# Altium PCB MB.PcbDoc
Units mil, origin at the board's own origin, x right, y up, seen from the top; angles counter-clockwise.
Board outline 5905.51 x 5945.22 mil, 2 copper layers (Top Layer, Bottom Layer); 33 components, 167 nets, 436 pads, 48 vias.
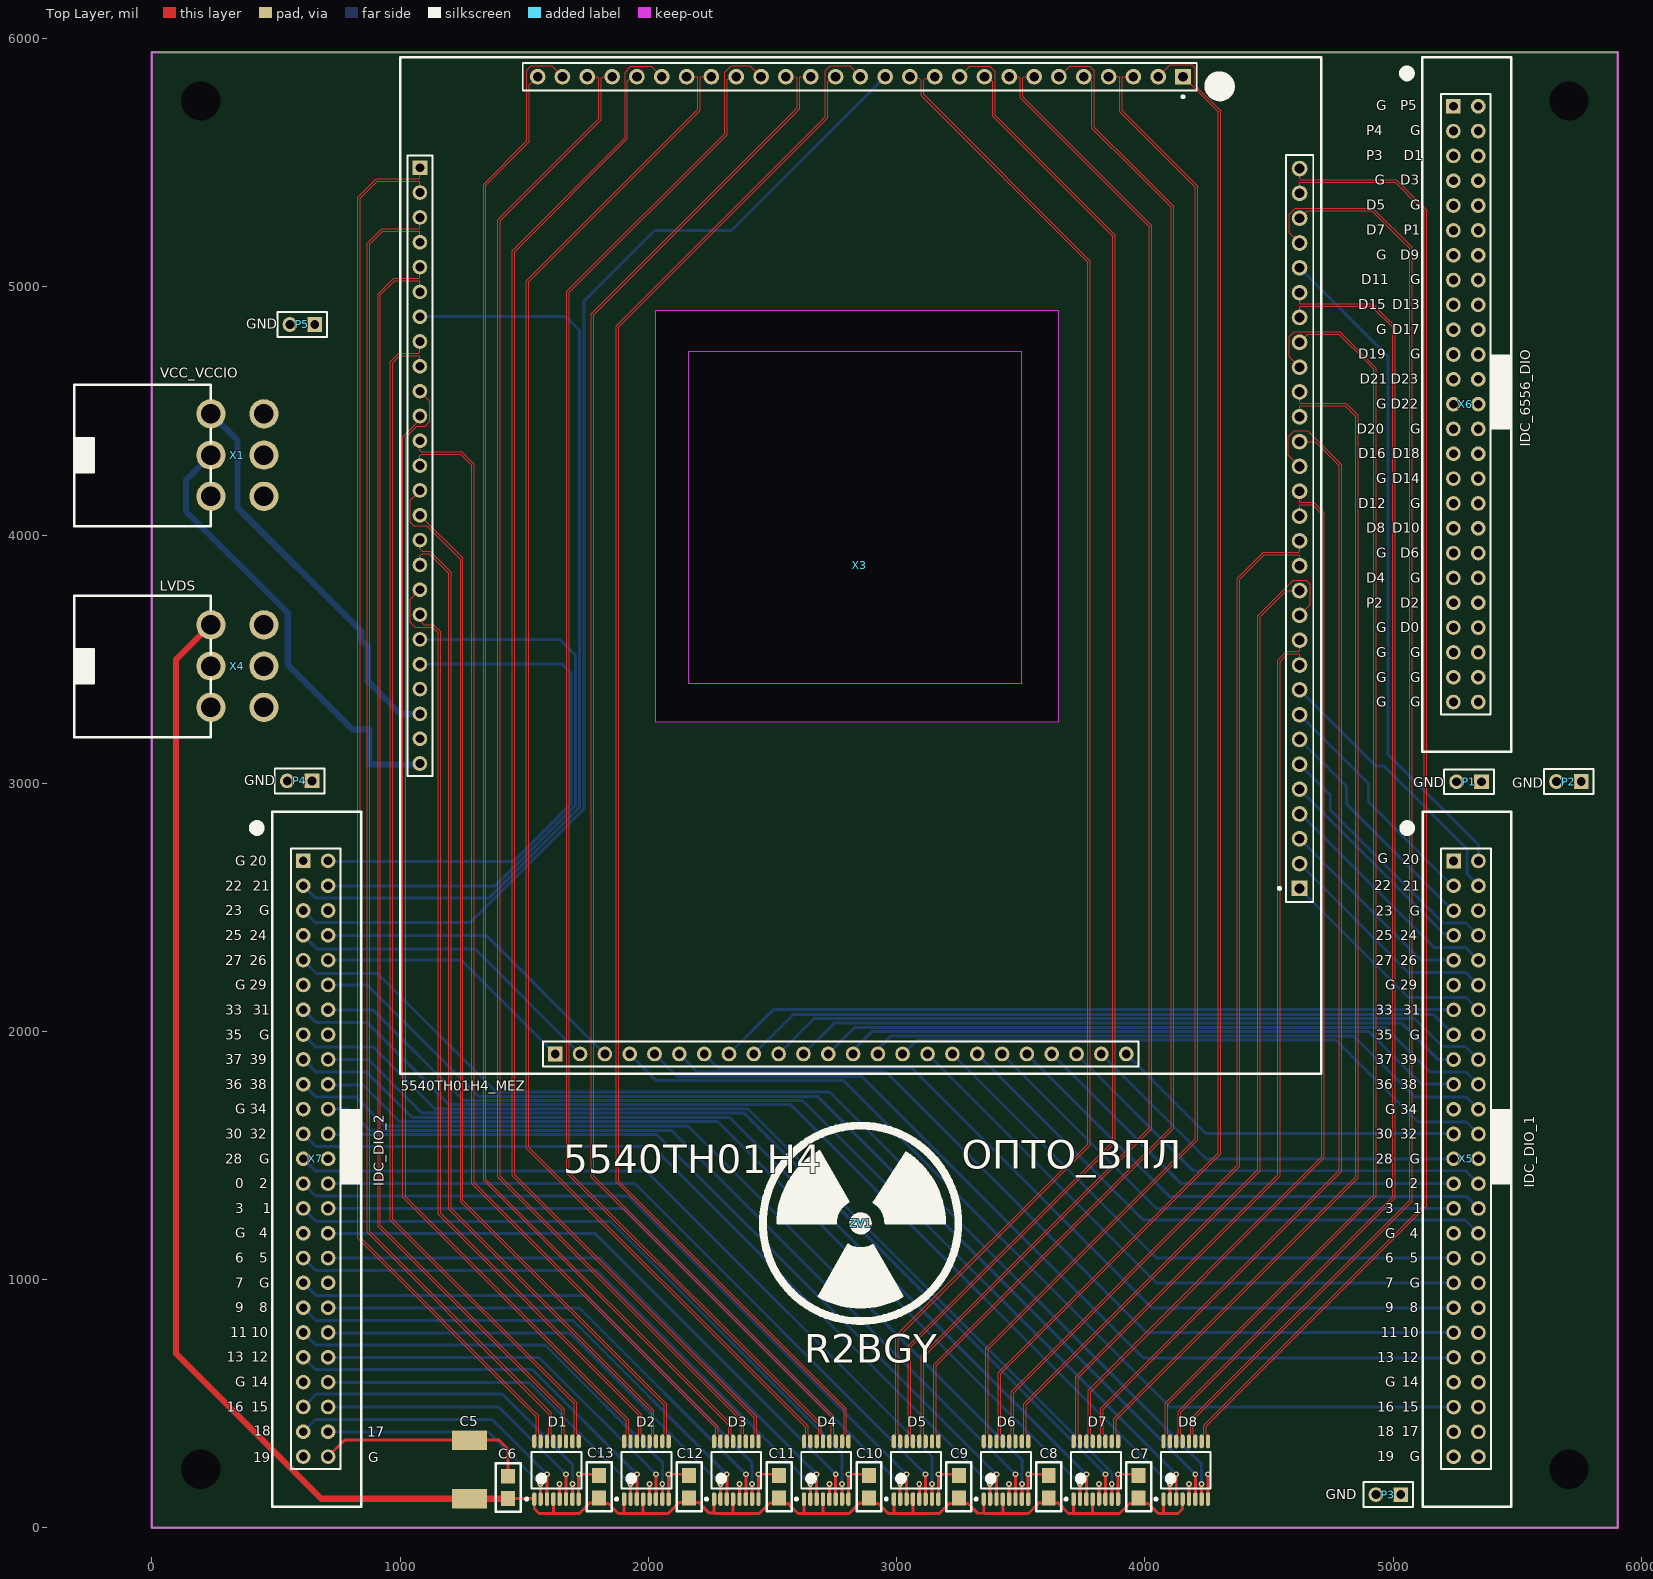
[diagram p0: Top Layer view]
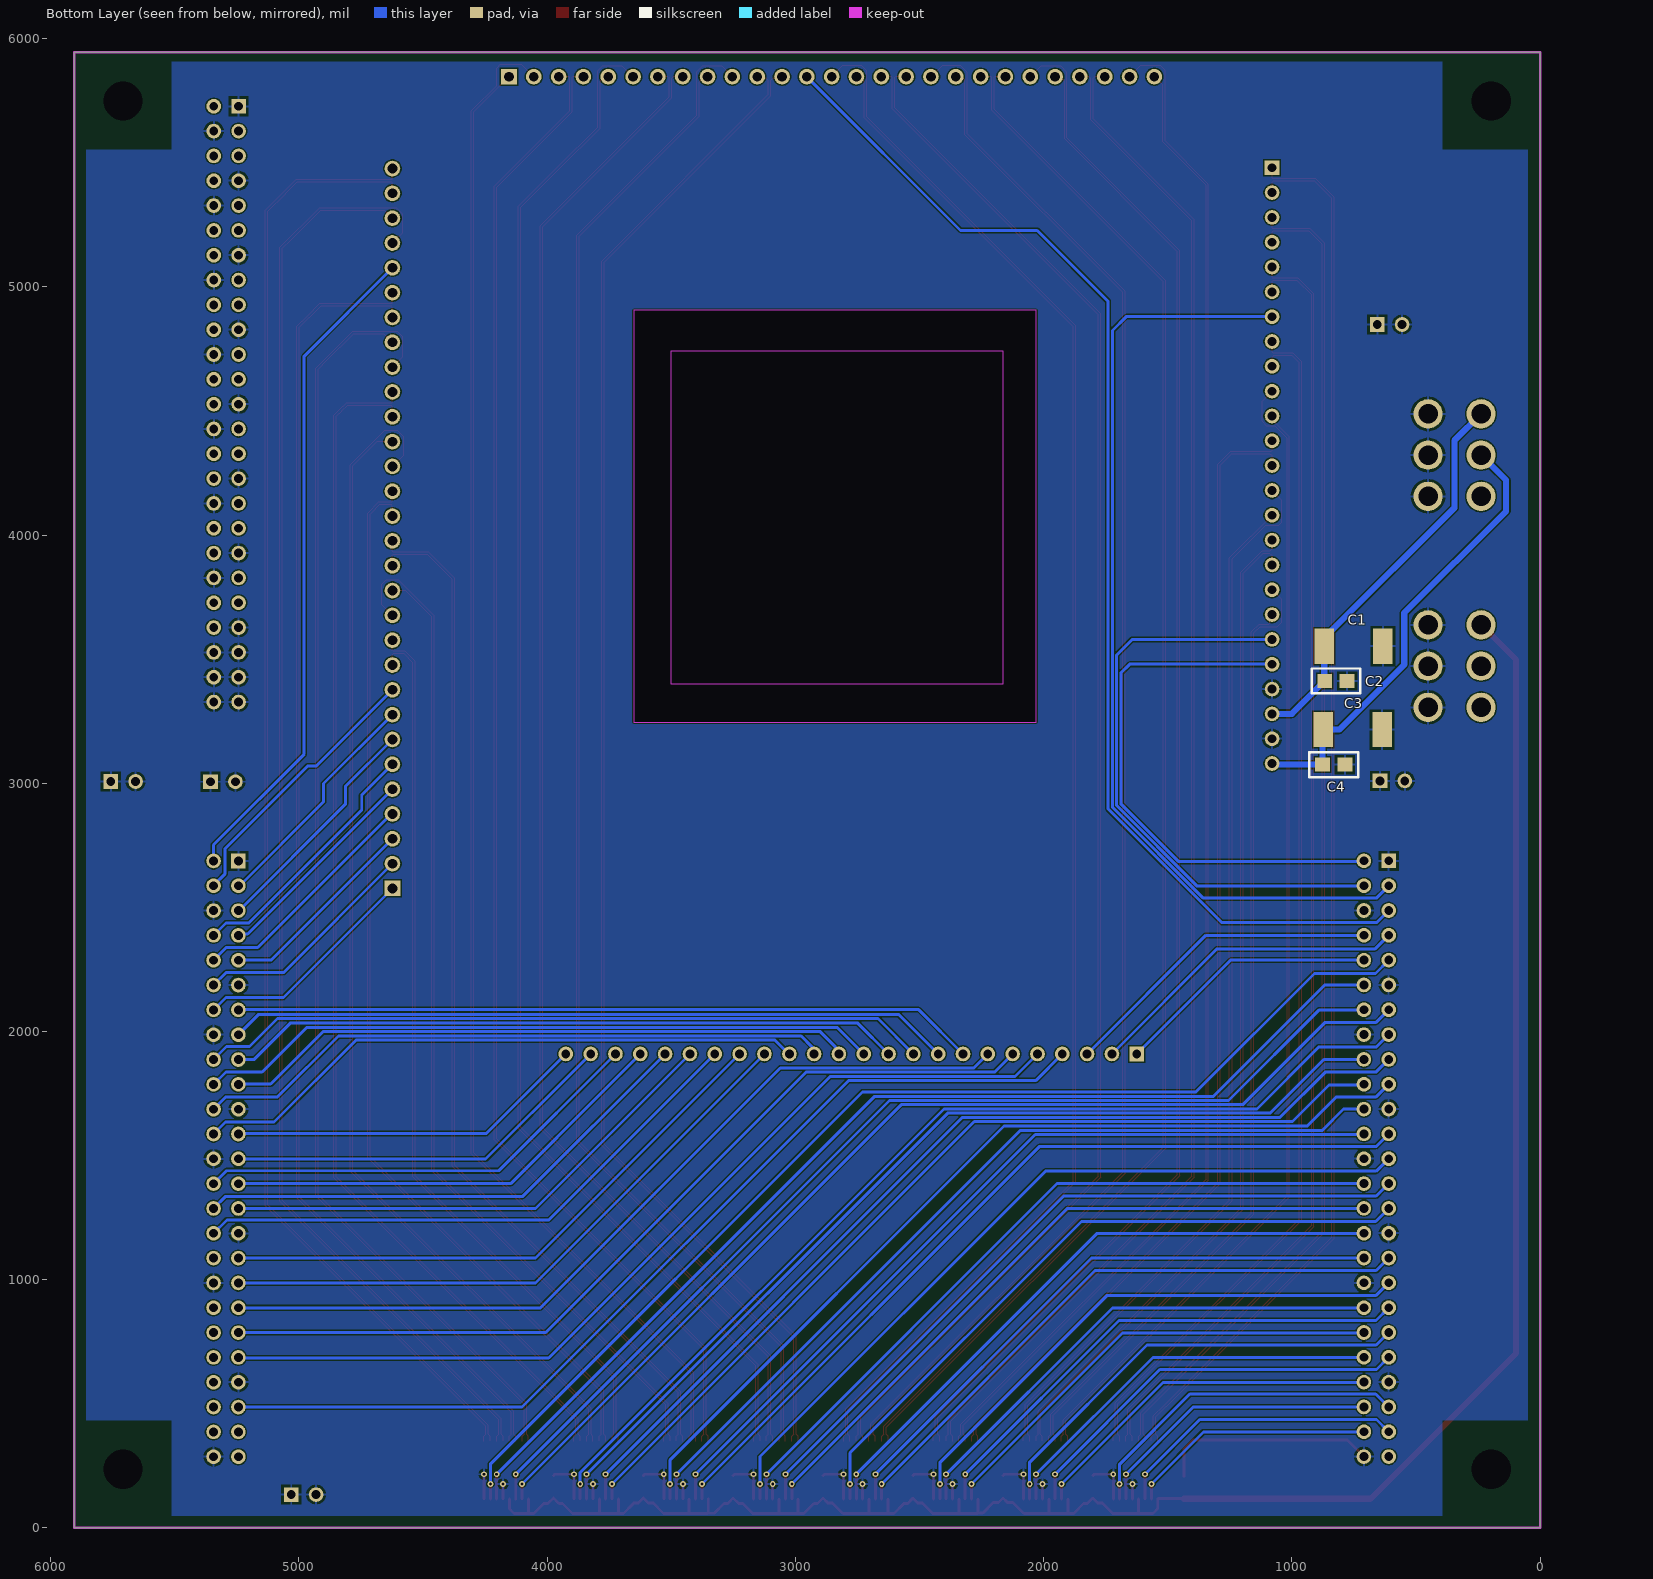
[diagram p1: Bottom Layer view, seen from below]

## Layer stack, top to bottom
Top Solder: solder mask 0.4, Solder Resist, Dk 3.5
Top Layer: signal copper 1.4
Dielectric 1: dielectric 12.6, FR-4, Dk 4.8
Bottom Layer: signal copper 1.4
Bottom Solder: solder mask 0.4, Solder Resist, Dk 3.5

## Board outline
0.15,0 0.15,5945.22 5905.66,5945.22 5905.66,0
cut-out: 3501.87,4740.03 3501.87,3401.45 2163.29,3401.45 2163.29,4740.03
cut-out: 3651,4905.37 3651,3245.37 2030,3245.37 2030,4905.37

## Design rules (kind name [scope] priority, off if disabled: settings)
Clearance [All] p1: gap=5 ignorepadtopadclearanceinfootprint=FALSE
DiffPairsRouting [All] p1: maxlimit=10 minlimit=5 mostfreqgap=5 toplayer_minwidth=5 toplayer_maxwidth=15 toplayer_prefwidth=5 bottomlayer_minwidth=5 bottomlayer_maxwidth=15 bottomlayer_prefwidth=5 maxuncoupledlength=500
PolygonConnect [All] p1: connectstyle=Relief reliefconductorwidth=10 reliefentries=4 polygonreliefangle="90 Angle" airgapwidth=10
RoutingVias [All] p1: holewidth=28 width=50 viastyle="Through Hole" minholewidth=28 minwidth=50 maxholewidth=28 maxwidth=50
SolderMaskExpansion [All] p1: expansion=4 istentingtop=FALSE
Width [All] p1: maxlimit=78.74 minlimit=5 preferedwidth=10
29 further rules are at their usual default settings.

## Classes and differential pairs
differential pair adci3_6: +adci3_6_P -adci3_6_N
differential pair adci3_5: +adci3_5_P -adci3_5_N
differential pair adci3_4: +adci3_4_P -adci3_4_N
differential pair adci3_3: +adci3_3_P -adci3_3_N
differential pair adci3_2: +adci3_2_P -adci3_2_N
differential pair adci3_1: +adci3_1_P -adci3_1_N
differential pair adci3_0: +adci3_0_P -adci3_0_N
differential pair adci2_6: +adci2_6_P -adci2_6_N
differential pair adci2_5: +adci2_5_P -adci2_5_N
differential pair adci2_4: +adci2_4_P -adci2_4_N
differential pair adci2_3: +adci2_3_P -adci2_3_N
differential pair adci2_2: +adci2_2_P -adci2_2_N
differential pair adci2_1: +adci2_1_P -adci2_1_N
differential pair adci2_0: +adci2_0_P -adci2_0_N
differential pair adci1_6: +adci1_6_P -adci1_6_N
differential pair adci1_5: +adci1_5_P -adci1_5_N
differential pair adci1_4: +adci1_4_P -adci1_4_N
differential pair adci1_3: +adci1_3_P -adci1_3_N
differential pair adci1_2: +adci1_2_P -adci1_2_N
differential pair adci1_1: +adci1_1_P -adci1_1_N
differential pair adci1_0: +adci1_0_P -adci1_0_N
differential pair adci0_6: +adci0_6_P -adci0_6_N
differential pair adci0_5: +adci0_5_P -adci0_5_N
differential pair adci0_4: +adci0_4_P -adci0_4_N
differential pair adci0_3: +adci0_3_P -adci0_3_N
differential pair adci0_2: +adci0_2_P -adci0_2_N
differential pair adci0_1: +adci0_1_P -adci0_1_N
differential pair adci0_0: +adci0_0_P -adci0_0_N
differential pair adcc_3: +adcc_3_P -adcc_3_N
differential pair adcc_2: +adcc_2_P -adcc_2_N
differential pair adcc_1: +adcc_1_P -adcc_1_N
differential pair adcc_0: +adcc_0_P -adcc_0_N

## Components (designator, comment, footprint, x,y, rotation, side; value= is the part's Value field where it differs from the comment)
C1 "CAP_BIG" Cap_BIG 913,3627 r270 bottom
C2 "CAP_SMALL" CAP_SMALL 724,3462 r0 bottom
C3 "CAP_BIG" Cap_BIG 916,3291 r270 bottom
C4 "CAP_SMALL" CAP_SMALL 733,3125 r0 bottom
C5 "CAP_BIG" Cap_BIG 1204,75 r0 top
C6 "CAP_SMALL" CAP_SMALL 1385,262 r270 top
C7 "CAP_SMALL" CAP_SMALL 3925,264.37 r270 top
C8 "CAP_SMALL" CAP_SMALL 3563,264.37 r270 top
C9 "CAP_SMALL" CAP_SMALL 3201,264.37 r270 top
C10 "CAP_SMALL" CAP_SMALL 2839,264.37 r270 top
C11 "CAP_SMALL" CAP_SMALL 2477,264.37 r270 top
C12 "CAP_SMALL" CAP_SMALL 2114,264.37 r270 top
C13 "CAP_SMALL" CAP_SMALL 1752,264.37 r270 top
D1 "DS90LV047A" TSOP65P640X120-16N 1630,232.37 r90 top
D2 "DS90LV047A" TSOP65P640X120-16N 1992.14,232.37 r90 top
D3 "DS90LV047A" TSOP65P640X120-16N 2354.29,232.37 r90 top
D4 "DS90LV047A" TSOP65P640X120-16N 2716.43,232.37 r90 top
D5 "DS90LV047A" TSOP65P640X120-16N 3078.57,232.37 r90 top
D6 "DS90LV047A" TSOP65P640X120-16N 3440.71,232.37 r90 top
D7 "DS90LV047A" TSOP65P640X120-16N 3802.86,232.37 r90 top
D8 "DS90LV047A" TSOP65P640X120-16N 4165,232.37 r90 top
P1 "GND" HDR1X2 5356,3006 r180 top
P2 "GND" HDR1X2 5758,3007 r180 top
P3 "GND" HDR1X2 5031,134.37 r180 top
P4 "GND" HDR1X2 645,3009.37 r180 top
P5 "GND" HDR1X2 656,4848 r180 top
X1 "VCC_VCCIO" POWER 238,4488 r90 top
X3 "5540TH01H4_MEZ" 5540TH01H4_MEZ 4154,5846.37 r270 top
X4 "LVDS" POWER 238,3638 r90 top
X5 "IDC_DIO_1" IDC_DIO 5244,2687 r270 top
X6 "IDC_6556_DIO" IDC_6556_DIO 5243,5727.11 r270 top
X7 "IDC_DIO_2" IDC_DIO 610,2687.37 r270 top
ZV1 "RAD" RADIATION 2855,1227 r0 top

## Footprints (in the part's own frame and the unit in brackets; to place one, negate y for a bottom-side part, rotate by r counter-clockwise, add the part's x,y. Pads: shape width x height; smd on the part's side, far side on the other; paste and mask are expansions set on the pad)
5540TH01H4_MEZ [mm]
  rect 1.6x1.6 hole 0.99: 1(0,0) 77(83.06,11.92)
  round 1.6 hole 0.99: 2(0,-2.54) 3(0,-5.08) 4(0,-7.62) 5(0,-10.16) 6(0,-12.7) 7(0,-15.24) 8(0,-17.78) 9(0,-20.32) 10(0,-22.86) 11(0,-25.4) 12(0,-27.94) 13(0,-30.48) 14(0,-33.02) 15(0,-35.56) 16(0,-38.1) 17(0,-40.64) 18(0,-43.18) 19(0,-45.72) 20(0,-48.26) 21(0,-50.8) 22(0,-53.34) 23(0,-55.88) 24(0,-58.42) 25(0,-60.96) 26(0,-63.5) 27(0,-66.04) 78(80.52,11.92) 79(77.98,11.92) 80(75.44,11.92) 81(72.9,11.92) 82(70.36,11.92) 83(67.82,11.92) 84(65.28,11.92) 85(62.74,11.92) 86(60.2,11.92) 87(57.66,11.92) 88(55.12,11.92) 89(52.58,11.92) 90(50.04,11.92) 91(47.5,11.92) 92(44.96,11.92) 93(42.42,11.92) 94(39.88,11.92) 95(37.34,11.92) 96(34.8,11.92) 97(32.26,11.92) 98(29.72,11.92) 99(27.18,11.92) 100(24.64,11.92) 101(22.1,11.92) 102(19.56,11.92) 103(17.02,11.92) 104(14.48,11.92) 105(11.94,11.92) 106(9.4,11.92)
  rect 1.5x1.5 hole 0.9: 28(9.32,-78.08) 53(100,-64.24)
  round 1.5 hole 0.9: 29(11.86,-78.08) 30(14.4,-78.08) 31(16.94,-78.08) 32(19.48,-78.08) 33(22.02,-78.08) 34(24.56,-78.08) 35(27.1,-78.08) 36(29.64,-78.08) 37(32.18,-78.08) 38(34.72,-78.08) 39(37.26,-78.08) 40(39.8,-78.08) 41(42.34,-78.08) 42(44.88,-78.08) 43(47.42,-78.08) 44(49.96,-78.08) 45(52.5,-78.08) 46(55.04,-78.08) 47(57.58,-78.08) 48(60.12,-78.08) 49(62.66,-78.08) 50(65.2,-78.08) 51(67.74,-78.08) 52(70.28,-78.08) 54(100,-61.7) 55(100,-59.16) 56(100,-56.62) 57(100,-54.08) 58(100,-51.54) 59(100,-49) 60(100,-46.46) 61(100,-43.92) 62(100,-41.38) 63(100,-38.84) 64(100,-36.3) 65(100,-33.76) 66(100,-31.22) 67(100,-28.7) 68(100,-26.14) 69(100,-23.6) 70(100,-21.06) 71(100,-18.52) 72(100,-15.98) 73(100,-13.44) 74(100,-10.9) 75(100,-8.36) 76(100,-5.82)
  silkscreen extent -2,-80.08 102,14.13
Cap_BIG [mm] "FROM_MAX"
  rect 3.6x2 smd: 1(1.905,7.092) 2(1.905,1.092)
  body extent 0,-0.01 3.81,8.19, height 2.54
CAP_SMALL [mil] "FROM_MAX"
  rect 60x55.98 smd: 1(53.71,50) 2(143.71,50)
  silkscreen extent 1,0 197,100, body extent 20,18 178,82, height 100
HDR1X2 [mm] "Connector; Header; 2 Position"
  rect 1.5x1.5 hole 0.9: 1(0,0)
  round 1.5 hole 0.9: 2(2.54,0)
  silkscreen extent -1.27,-1.27 3.81,1.27
IDC_6556_DIO [mm]
  rect 1.5x1.5 hole 0.9: 1(0,0)
  round 1.5 hole 0.9: 2(0,2.54) 3(2.54,0) 4(2.54,2.54) 5(5.08,0) 6(5.08,2.54) 7(7.62,0) 8(7.62,2.54) 9(10.16,0) 10(10.16,2.54) 11(12.7,0) 12(12.7,2.54) 13(15.24,0) 14(15.24,2.54) 15(17.78,0) 16(17.78,2.54) 17(20.32,0) 18(20.32,2.54) 19(22.86,0) 20(22.86,2.54) 21(25.4,0) 22(25.4,2.54) 23(27.94,0) 24(27.94,2.54) 25(30.48,0) 26(30.48,2.54) 27(33.02,0) 28(33.02,2.54) 29(35.56,0) 30(35.56,2.54) 31(38.1,0) 32(38.1,2.54) 33(40.64,0) 34(40.64,2.54) 35(43.18,0) 36(43.18,2.54) 37(45.72,0) 38(45.72,2.54) 39(48.26,0) 40(48.26,2.54) 41(50.8,0) 42(50.8,2.54) 43(53.34,0) 44(53.34,2.54) 45(55.88,0) 46(55.88,2.54) 47(58.42,0) 48(58.42,2.54) 49(60.96,0) 50(60.96,2.54)
  silkscreen extent -5.03,-5.14 66.07,5.92
IDC_DIO [mm]
  rect 1.5x1.5 hole 0.9: 1(0,0)
  round 1.5 hole 0.9: 2(0,2.54) 3(2.54,0) 4(2.54,2.54) 5(5.08,0) 6(5.08,2.54) 7(7.62,0) 8(7.62,2.54) 9(10.16,0) 10(10.16,2.54) 11(12.7,0) 12(12.7,2.54) 13(15.24,0) 14(15.24,2.54) 15(17.78,0) 16(17.78,2.54) 17(20.32,0) 18(20.32,2.54) 19(22.86,0) 20(22.86,2.54) 21(25.4,0) 22(25.4,2.54) 23(27.94,0) 24(27.94,2.54) 25(30.48,0) 26(30.48,2.54) 27(33.02,0) 28(33.02,2.54) 29(35.56,0) 30(35.56,2.54) 31(38.1,0) 32(38.1,2.54) 33(40.64,0) 34(40.64,2.54) 35(43.18,0) 36(43.18,2.54) 37(45.72,0) 38(45.72,2.54) 39(48.26,0) 40(48.26,2.54) 41(50.8,0) 42(50.8,2.54) 43(53.34,0) 44(53.34,2.54) 45(55.88,0) 46(55.88,2.54) 47(58.42,0) 48(58.42,2.54) 49(60.96,0) 50(60.96,2.54)
  silkscreen extent -5.03,-5.14 66.07,5.92
POWER [mm] "POWER"
  round 3 hole 2: 1(0,0) 2(-4.217,0) 3(-8.435,0) 4(0,-5.422) 5(-4.217,-5.422) 6(-8.435,-5.422)
  silkscreen extent -11.5,0 3,14
RADIATION [mil]
  silkscreen extent -394,-394 394,394
TSOP65P640X120-16N [mm] "TSOP, 16-Leads, Body 5,00x4,40mm, Pitch 0,65mm, IPC Medium Density"
  oval 1.4x0.45 smd: 1(-2.95,2.275) 2(-2.95,1.625) 3(-2.95,0.975) 4(-2.95,0.325) 5(-2.95,-0.325) 6(-2.95,-0.975) 7(-2.95,-1.625) 8(-2.95,-2.275) 9(2.95,-2.275) 10(2.95,-1.625) 11(2.95,-0.975) 12(2.95,-0.325) 13(2.95,0.325) 14(2.95,0.975) 15(2.95,1.625) 16(2.95,2.275)
  silkscreen extent -3.07,-2.55 1.85,3.17, body extent -2.25,-2.55 2.25,2.55, height 1.2

## Part data
P1 P2 P3 P4 P5: library part "Header 2", "Header, 2-Pin", LatestRevisionDate=17-Jul-2002, LatestRevisionNote="Re-released for DXP Platform.", Publisher="Altium Limited"
X1 X4: library part POWER
X5 X7: library part IDC_DIO
ZV1: library part Radiation

## Free pads (board coordinates)
  round 118.11 hole 157.48 unplated: 0(197,236.56) 0(197,5748.37) 0(5708.81,236.56) 0(5708.81,5748.37)

## Via types
v1: diameter 23.62, hole 11.81, Top Layer to Bottom Layer, 48 vias

## Nets (pads, with @x,y where several pads share a name; then routed paths per layer and width w, separated by ;. In a path a pad name is that pad's centre, name@x,y a point inside that pad or via, vN(x,y) a via of type N, cw(c..) or ccw(c..) an arc to the next point about the centre after c; other vN are vias at no path point)
1_DIN1: D1.2 X7.48 | length 1004
  Top Layer w12: D1.2 v1(1566.02,177.37)
  Bottom Layer w12.01: X7.48@710,387 1356.39,387 v1(1566.02,177.37)
1_DIN2: D1.3 X7.47 | length 1193.7
  Top Layer w12: D1.3 v1(1591.61,216.37)
  Bottom Layer w12.01: X7.47 659.63,437 1370.98,437 v1(1591.61,216.37)
1_DIN3: D1.6 X7.46 | length 1170.8
  Top Layer w12: D1.6 v1(1668.39,216.37)
  Bottom Layer w12: X7.46 1397.39,487.37 v1(1668.39,216.37)
1_DIN4: D1.7 X7.45 | length 1363.8
  Top Layer w12: D1.7 v1(1693.98,177.37)
  Bottom Layer w12: X7.45 662.63,540 1411,540 1693.98,257.02 v1(1693.98,177.37)
2_DIN1: D2.2 X7.44 | length 1448.6
  Top Layer w12: D2.2 v1(1928.17,177.37)
  Bottom Layer w12: X7.44@710,586 1519.54,586 v1(1928.17,177.37)
2_DIN2: D2.3 X7.41 | length 1639
  Top Layer w12: D2.3 v1(1953.76,216.37)
  Bottom Layer w12: X7.41 659.37,638 1532.13,638 v1(1953.76,216.37)
2_DIN3: D2.6 X7.42 | length 1615.6
  Top Layer w12: D2.6 v1(2030.53,216.37)
  Bottom Layer w12: X7.42@710,687 1559.9,687 v1(2030.53,216.37)
2_DIN4: D2.7 X7.39 | length 1811.2
  Top Layer w12: D2.7 v1(2056.12,177.37)
  Bottom Layer w12: X7.39 660.37,737 1584,737 2056.12,264.88 v1(2056.12,177.37)
3_DIN1: D3.2 X7.40 | length 1893.1
  Top Layer w12: D3.2 v1(2290.31,177.37)
  Bottom Layer w12: X7.40@710,785 1682.68,785 v1(2290.31,177.37)
3_DIN2: D3.3 X7.37 | length 2084
  Top Layer w12: D3.3 v1(2315.9,216.37)
  Bottom Layer w12: X7.37 661.37,836 1696.27,836 v1(2315.9,216.37)
3_DIN3: D3.6 X7.38 | length 2060.2
  Top Layer w12: D3.6 v1(2392.67,216.37)
  Bottom Layer w12: X7.38@710,886 1723.04,886 v1(2392.67,216.37)
3_DIN4: D3.7 X7.35 | length 2254.9
  Top Layer w12: D3.7 v1(2418.26,177.37)
  Bottom Layer w12: X7.35 660.37,937 1744,937 2418.26,262.74 v1(2418.26,177.37)
4_DIN1: D4.2 X7.33 | length 2480.5
  Top Layer w12: D4.2 v1(2652.45,177.37)
  Bottom Layer w12: X7.33 660.37,1037 1792.82,1037 v1(2652.45,177.37)
4_DIN2: D4.3 X7.34 | length 2429
  Top Layer w12: D4.3 v1(2678.04,216.37)
  Bottom Layer w12: X7.34 1807.04,1087.37 v1(2678.04,216.37)
4_DIN3: D4.6 X7.32 | length 2547
  Top Layer w12: D4.6 v1(2754.81,216.37)
  Bottom Layer w12: X7.32@710,1187 1784.18,1187 v1(2754.81,216.37)
4_DIN4: D4.7 X7.29 | length 2764.7
  Top Layer w12: D4.7 v1(2780.4,177.37)
  Bottom Layer w12: X7.29 662.37,1235 1848,1235 2780.4,302.6 v1(2780.4,177.37)
5_DIN1: D5.2 X7.30 | length 2824.9
  Top Layer w12: D5.2 v1(3014.59,177.37)
  Bottom Layer w12: X7.30@710,1286 1905.97,1286 v1(3014.59,177.37)
5_DIN2: D5.3 X7.27 | length 3015.4
  Top Layer w12: D5.3 v1(3040.19,216.37)
  Bottom Layer w12: X7.27 660.37,1337 1919.56,1337 v1(3040.19,216.37)
5_DIN3: D5.6 X7.28 | length 2992.1
  Top Layer w12: D5.6 v1(3116.96,216.37)
  Bottom Layer w12: X7.28 1945.96,1387.37 v1(3116.96,216.37)
5_DIN4: D5.7 X7.25 | length 3200.8
  Top Layer w12: D5.7 v1(3142.55,177.37)
  Bottom Layer w12: X7.25 660.37,1437 1993,1437 3142.55,287.45 v1(3142.55,177.37)
6_DIN1: D6.2 X7.23 | length 3411.9
  Top Layer w12: D6.2 v1(3376.74,177.37)
  Bottom Layer w12: X7.23 661.37,1536 2018.11,1536 v1(3376.74,177.37)
6_DIN2: D6.3 X7.24 | length 3359.4
  Top Layer w12: D6.3 v1(3402.33,216.37)
  Bottom Layer w12: X7.24@710,1585 2033.7,1585 v1(3402.33,216.37)
6_DIN3: D6.6 X7.22 | length 3478.5
  Top Layer w12: D6.6 v1(3479.1,216.37)
  Bottom Layer w12: X7.22 791.63,1687.37 877,1602 2093.47,1602 v1(3479.1,216.37)
6_DIN4: D6.7 X7.19 | length 3679.5
  Top Layer w12: D6.7 v1(3504.69,177.37)
  Bottom Layer w12: X7.19 660.37,1737 820,1737 938,1619 2160,1619 3504.69,274.31 v1(3504.69,177.37)
7_DIN1: D7.2 X7.20 | length 3755.5
  Top Layer w12: D7.2 v1(3738.88,177.37)
  Bottom Layer w12: X7.20@710,1784 851,1784 998,1637 2279.25,1637 v1(3738.88,177.37)
7_DIN2: D7.3 X7.17 | length 3946.6
  Top Layer w12: D7.3 v1(3764.47,216.37)
  Bottom Layer w12: X7.17@610.32,1887.68 662,1836 866,1836 1048,1654 2326.84,1654 v1(3764.47,216.37)
7_DIN3: D7.6 X7.18 | length 3923.5
  Top Layer w12: D7.6 v1(3841.24,216.37)
  Bottom Layer w12: X7.18 871.63,1887.37 1088,1671 2386.61,1671 v1(3841.24,216.37)
7_DIN4: D7.7 X7.15 | length 4094.5
  Top Layer w12: D7.7 v1(3866.83,177.37)
  Bottom Layer w12: X7.15 659.37,1938 891,1938 1141,1688 1585.75,1688 2401.87,1688 3866.83,223.04 v1(3866.83,177.37)
8_DIN1: D8.2 X7.13 | length 4343.3
  Top Layer w12: D8.2 v1(4101.02,177.37)
  Bottom Layer w12: X7.13 660.37,2037 866,2037 1198,1705 2573.39,1705 v1(4101.02,177.37)
8_DIN2: D8.3 X7.14 | length 4291.7
  Top Layer w12: D8.3 v1(4126.61,216.37)
  Bottom Layer w12: X7.14 889.63,2087.37 1255,1722 2620.98,1722 v1(4126.61,216.37)
8_DIN3: D8.6 X7.12 | length 4409.9
  Top Layer w12: D8.6 v1(4203.39,216.37)
  Bottom Layer w12: X7.12 867.63,2187.37 1316,1739 2680.76,1739 v1(4203.39,216.37)
8_DIN4: D8.7 X7.9 | length 4600.8
  Top Layer w12: D8.7 v1(4228.98,177.37)
  Bottom Layer w12: X7.9 663.37,2234 909,2234 1387,1756 2730,1756 4228.98,257.02 v1(4228.98,177.37)
adcc_0_N: D8.13 X3.101 | length 5318.5
  Top Layer w5: D8.13 4152.2,368.7 4144.41,376.5 4144.41,465.78 5008,1329.37 5008,4840.51 4969.07,4879.44 4917.22,4931.29 4626.22,4931.29 4623.29,4934.22 X3.101
adcc_0_P: D8.14 X3.100 | length 5302
  Top Layer w5: D8.14 4126.61,368.7 4134.41,376.5 4134.41,469.92 4998,1333.51 4998,4836.37 4962,4872.37 4959.07,4875.3 4913.08,4921.29 4626.22,4921.29 4623.29,4918.36 X3.100
adcc_1_N: D5.16 X3.12 | length 6135.3
  Top Layer w5: D5.16 2989,368.7 2996.8,376.5 2996.8,773.31 3770,1546.51 3770,5099.37 3645,5224.37 3099,5770.37 3099,5831 3090.07,5839.93 3060.44,5839.93 X3.12
adcc_1_P: D5.15 X3.11 | length 6135.3
  Top Layer w5: D5.15 3014.59,368.7 3006.8,376.5 3006.8,769.17 3780,1542.37 3780,5103.51 3109,5774.51 3109,5831 3117.93,5839.93 3147.56,5839.93 X3.11
adcc_2_N: D1.16 X3.28 | length 5638
  Top Layer w5: X3.28 1079.98,5437.37 1077.06,5434.44 902.93,5434.44 829,5360.51 829,1166.37 1507.07,488.3 1510,485.37 1548.23,447.14 1548.23,376.5 1540.43,368.7 D1.16
adcc_2_P: D1.15 X3.29 | length 5621.5
  Top Layer w5: X3.29 1079.98,5421.51 1077.06,5424.44 907.07,5424.44 839,5356.37 839,1170.51 1517.07,492.44 1558.23,451.28 1558.23,376.5 1566.02,368.7 D1.15
adcc_3_N: D2.13 X3.46 | length 3726.1
  Top Layer w5: X3.46 1088.7,3670.72 1088.7,3645.8 1095.4,3639.1 1134.05,3639.1 1163,3610.14 1163,1267.51 1971.55,458.96 1971.55,376.5 1979.35,368.7 D2.13
adcc_3_P: D2.14 X3.45 | length 3872
  Top Layer w5: X3.45 1041,3740.46 1041,3649 1060.9,3629.1 1129.9,3629.1 1153,3606 1153,1263.37 1899,517.37 1961.55,454.82 1961.55,376.5 1953.76,368.7 D2.14
adci0_0_N: D8.16 X3.99 | length 5041.9
  Top Layer w5: D8.16 4075.43,368.7 4083.23,376.5 4083.23,501.74 4923,1341.51 4923,4667.37 4889,4701.37 4781.37,4809 4656,4809 X3.99
adci0_0_P: D8.15 X3.98 | length 5234.3
  Top Layer w5: D8.15 4101.02,368.7 4093.23,376.5 4093.23,497.6 4933,1337.37 4933,4671.51 4785.51,4819 4602,4819 4582,4799 4582,4717.58 X3.98
adci0_1_N: D7.9 X3.97 | length 4840
  Top Layer w5: D7.9 3892.42,368.7 3884.63,376.5 3884.63,436 4859,1410.37 4859,4482.51 4837.07,4504.44 4810.22,4531.29 4626.22,4531.29 4623.29,4534.22 X3.97
adci0_1_P: D7.10 X3.96 | length 4823.5
  Top Layer w5: D7.10 3866.83,368.7 3874.63,376.5 3874.63,440.14 4849,1414.51 4849,4478.37 4830,4497.37 4827.07,4500.3 4806.08,4521.29 4626.22,4521.29 4623.29,4518.36 X3.96
adci0_2_N: D7.12 X3.95 | length 4531.4
  Top Layer w5: D7.12 3815.65,368.7 3823.45,376.5 3823.45,481.96 4783,1441.51 4783,4279.37 4765,4297.37 4686.08,4376.29 X3.95
adci0_2_P: D7.11 X3.94 | length 4755.6
  Top Layer w5: D7.11 3841.24,368.7 3833.45,376.5 3833.45,477.82 4793,1437.37 4793,4283.51 4656.51,4420 4602,4420 4578,4396 4578,4321.58 X3.94
adci0_3_N: D7.13 X3.93 | length 4293.6
  Top Layer w5: D7.13 3790.06,368.7 3782.27,376.5 3782.27,549.64 4723,1490.37 4723,4088.51 4680.22,4131.29 4626.22,4131.29 4623.29,4134.22 X3.93
adci0_3_P: D7.14 X3.92 | length 4277
  Top Layer w5: D7.14 3764.47,368.7 3772.27,376.5 3772.27,553.78 4713,1494.51 4713,4084.37 4676.08,4121.29 4626.22,4121.29 4623.29,4118.36 X3.92
adci0_4_N: D6.12 X3.91 | length 4195.8
  Top Layer w5: D6.12 3453.51,368.7 3461.3,376.5 3461.3,548.82 4373,1460.51 4373,3826.51 4477.78,3931.29 4620.36,3931.29 4623.29,3934.22 X3.91
adci0_4_P: D6.11 X3.90 | length 4179.3
  Top Layer w5: D6.11 3479.1,368.7 3471.3,376.5 3471.3,544.67 4383,1456.37 4383,3822.37 4481.92,3921.29 4620.36,3921.29 4623.29,3918.36 X3.90
adci0_5_N: D6.9 X3.89 | length 3918.2
  Top Layer w5: D6.9 3530.28,368.7 3522.49,376.5 3522.49,496.86 4465,1439.37 4465,3671.37 4569.92,3776.29 X3.89
adci0_5_P: D6.10 X3.88 | length 4140.7
  Top Layer w5: D6.10 3504.69,368.7 3512.49,376.5 3512.49,501 4455,1443.51 4455,3675.51 4597.49,3818 4650,3818 4666,3802 4666,3719 X3.88
adci0_6_N: D7.16 X3.87 | length 3633.2
  Top Layer w5: D7.16 3713.29,368.7 3721.09,376.5 3721.09,608.6 4533,1420.51 4533,3492.51 4571.86,3531.37 4602.54,3531.37 4602.61,3531.29 4620.36,3531.29 4623.29,3534.22 X3.87
adci0_6_P: D7.15 X3.86 | length 3616.7
  Top Layer w5: D7.15 3738.88,368.7 3731.09,376.5 3731.09,604.46 4543,1416.37 4543,3488.37 4576,3521.37 4598.39,3521.37 4598.47,3521.29 4620.36,3521.29 4623.29,3518.36 X3.86
adci1_0_N: D5.13 X3.10 | length 6231.2
  Top Layer w5: D5.13 3065.78,368.7 3057.98,376.5 3057.98,730.21 3880,1552.23 3880,5207.51 3755.07,5332.44 3397,5690.51 3397,5867 3376,5888 3295.63,5888 X3.10
adci1_0_P: D5.14 X3.9 | length 6062.1
  Top Layer w5: D5.14 3040.19,368.7 3047.98,376.5 3047.98,734.35 3870,1556.37 3870,5203.37 3748,5325.37 3745.07,5328.3 3387,5686.37 3387,5825 3365.63,5846.37 X3.9
adci1_1_N: D5.12 X3.8 | length 6137.3
  Top Layer w5: D5.12 3091.37,368.7 3099.16,376.5 3099.16,693.67 4018,1612.51 4018,5241.37 3892,5367.37 3498,5761.37 3498,5840 3491.63,5846.37 X3.8
adci1_1_P: D5.11 X3.7 | length 6139.9
  Top Layer w5: D5.11 3116.96,368.7 3109.16,376.5 3109.16,689.53 4028,1608.37 4028,5245.51 3508,5765.51 3508,5841 3513.37,5846.37 X3.7
adci1_2_N: D5.9 X3.6 | length 6222.1
  Top Layer w5: D5.9 3168.14,368.7 3160.34,376.5 3160.34,652.71 4117,1609.37 4117,5323.51 3963.07,5477.44 3797,5643.51 3797,5870 3778,5889 3696.63,5889 X3.6
adci1_2_P: D5.10 X3.5 | length 6052.3
  Top Layer w5: D5.10 3142.55,368.7 3150.34,376.5 3150.34,656.86 4107,1613.51 4107,5319.37 3956,5470.37 3953.07,5473.3 3787,5639.37 3787,5828.36 3768.99,5846.37 X3.5
adci1_3_N: D6.16 X3.4 | length 6019.9
  Top Layer w5: D6.16 3351.15,368.7 3358.94,376.5 3358.94,724.45 4203,1568.51 4203,5401.37 4056,5548.37 3899,5705.37 3899,5843.44 3896.07,5846.37 X3.4
adci1_3_P: D6.15 X3.3 | length 6019.9
  Top Layer w5: D6.15 3376.74,368.7 3368.94,376.5 3368.94,720.31 4213,1564.37 4213,5405.51 3909,5709.51 3909,5843.44 3911.93,5846.37 X3.3
adci1_4_N: D6.13 X3.2 | length 6120
  Top Layer w5: D6.13 3427.92,368.7 3420.12,376.5 3420.12,621.49 4306,1507.37 4306,5708.51 4204,5810.51 4204,5881 4191,5894 4101.63,5894 X3.2
adci1_4_P: D6.14 X3.1 | length 5926.8
  Top Layer w5: D6.14 3402.33,368.7 3410.12,376.5 3410.12,625.64 4296,1511.51 4296,5704.37 X3.1
adci1_5_N: D8.9 X3.106 | length 5937
  Top Layer w5: D8.9 4254.57,368.7 4246.77,376.5 4246.77,410.14 5135,1298.37 5135,5308.51 5065.07,5378.44 5012.22,5431.29 4626.22,5431.29 4623.29,5434.22 X3.106
adci1_5_P: D8.10 X3.105 | length 5920.4
  Top Layer w5: D8.10 4228.98,368.7 4236.77,376.5 4236.77,414.28 5125,1302.51 5125,5304.37 5058,5371.37 5055.07,5374.3 5008.08,5421.29 4626.22,5421.29 4623.29,5418.36 X3.105
adci1_6_N: D8.12 X3.104 | length 5693.8
  Top Layer w5: D8.12 4177.79,368.7 4185.59,376.5 4185.59,439.1 5067,1320.51 5067,5154.37 5034,5187.37 4914.37,5307 4654,5307 X3.104
adci1_6_P: D8.11 X3.103 | length 5884.1
  Top Layer w5: D8.11 4203.39,368.7 4195.59,376.5 4195.59,434.96 5077,1316.37 5077,5158.51 4918.51,5317 4605,5317 4581,5293 4581,5218.58 X3.103
adci2_0_N: D3.13 X3.27 | length 5996.4
  Top Layer w5: X3.27 1521,5813.37 1521,5583.23 1346,5408.23 1346,1405.51 2333.7,417.82 2333.7,376.5 2341.49,368.7 D3.13
adci2_0_P: D3.14 X3.26 | length 6177.4
  Top Layer w5: X3.26 1610.37,5890 1528,5890 1511,5873 1511,5587.37 1336,5412.37 1336,1401.37 2290,447.37 2323.7,413.68 2323.7,376.5 2315.9,368.7 D3.14
adci2_1_N: D3.12 X3.25 | length 6119.5
  Top Layer w5: X3.25 1793.63,5846.37 1801,5839 1801,5677.37 1393,5269.37 1393,1412.37 2315.07,490.3 2318,487.37 2374.88,430.49 2374.88,376.5 2367.08,368.7 D3.12
adci2_1_P: D3.11 X3.24 | length 6115.5
  Top Layer w5: X3.24 1853.56,5845.93 1817.93,5845.93 1811,5839 1811,5673.23 1403,5265.23 1403,1416.51 2325.07,494.44 2384.88,434.64 2384.88,376.5 2392.67,368.7 D3.11
adci2_2_N: D3.9 X3.23 | length 6120.7
  Top Layer w5: X3.23 1942.9,5835.27 1923.27,5835.27 1916,5828 1916,5595.37 1461,5140.37 1461,1423.51 2436.06,448.45 2436.06,376.5 2443.85,368.7 D3.9
adci2_2_P: D3.10 X3.22 | length 6287.7
  Top Layer w5: X3.22 2011.37,5889 1930,5889 1906,5865 1906,5599.51 1451,5144.51 1451,1419.37 2254,616.37 2426.06,444.31 2426.06,376.5 2418.26,368.7 D3.10
adci2_3_N: D4.16 X3.21 | length 6296.4
  Top Layer w5: X3.21 2196.07,5846.37 2199,5843.44 2199,5714.51 1509,5024.51 1509,1530.37 2588.07,451.3 2591,448.37 2634.66,404.71 2634.66,376.5 2626.86,368.7 D4.16
adci2_3_P: D4.15 X3.20 | length 6296.4
  Top Layer w5: X3.20 2211.93,5846.37 2209,5843.44 2209,5710.37 1519,5020.37 1519,1534.51 2598.07,455.44 2644.66,408.86 2644.66,376.5 2652.45,368.7 D4.15
adci2_4_N: D4.13 X3.19 | length 6213.8
  Top Layer w5: X3.19 2345.63,5838 2321,5838 2317,5834 2317,5612.37 1682,4977.37 1682,1433.51 2695.84,419.67 2695.84,376.5 2703.63,368.7 D4.13
adci2_4_P: D4.14 X3.18 | length 6378.9
  Top Layer w5: X3.18 2409.37,5891 2333,5891 2307,5865 2307,5616.51 1672,4981.51 1672,1429.37 2392,709.37 2685.84,415.53 2685.84,376.5 2678.04,368.7 D4.14
adci2_5_N: D4.12 X3.17 | length 6288.3
  Top Layer w5: X3.17 2596.07,5846.37 2599,5843.44 2599,5720.51 1770,4891.51 1770,1413.37 2673.07,510.3 2676,507.37 2737.02,446.35 2737.02,376.5 2729.22,368.7 D4.12
adci2_5_P: D4.11 X3.16 | length 6288.3
  Top Layer w5: X3.16 2611.93,5846.37 2609,5843.44 2609,5716.37 1780,4887.37 1780,1417.51 2683.07,514.44 2747.02,450.49 2747.02,376.5 2754.81,368.7 D4.11
adci2_6_N: D4.9 X3.15 | length 6249.1
  Top Layer w5: X3.15 2743.01,5846.37 2723,5826.36 2723,5681.23 1881,4839.23 1881,1397.51 2798.2,480.31 2798.2,376.5 2806,368.7 D4.9
adci2_6_P: D4.10 X3.14 | length 6420.8
  Top Layer w5: D4.10 2780.4,368.7 2788.2,376.5 2788.2,476.17 1873.93,1390.44 1871,1393.37 1871,4843.37 2713,5685.37 2713,5870 2733,5890 2810.37,5890 X3.14
adci3_0_N: D2.12 X3.44 | length 4028
  Top Layer w5: X3.44 1079.98,3915.98 1089,3925 1117,3925 1196,3846 1196,1284.37 1972.07,508.3 1975,505.37 2012.73,467.64 2012.73,376.5 2004.94,368.7 D2.12
adci3_0_P: D2.11 X3.43 | length 4043.5
  Top Layer w5: X3.43 1079.98,3944.02 1089,3935 1121.14,3935 1206,3850.14 1206,1288.51 1982.07,512.44 2022.73,471.78 2022.73,376.5 2030.53,368.7 D2.11
adci3_1_N: D2.9 X3.42 | length 4145.9
  Top Layer w5: X3.42 1252,3907.43 1252,1320.51 2073.91,498.6 2073.91,376.5 2081.71,368.7 D2.9
adci3_1_P: D2.10 X3.41 | length 4305.2
  Top Layer w5: X3.41 1041,4140.46 1041,4051 1054,4038 1107.28,4038 1242,3903.28 1242,1316.37 1980,578.37 2063.91,494.46 2063.91,376.5 2056.12,368.7 D2.10
adci3_2_N: D3.16 X3.40 | length 4613.2
  Top Layer w5: X3.40 1079.98,4318.98 1087,4326 1244,4326 1289,4281 1289,1386.37 2249.07,426.3 2252,423.37 2272.51,402.86 2272.51,376.5 2264.72,368.7 D3.16
adci3_2_P: D3.15 X3.39 | length 4627.8
  Top Layer w5: X3.39 1079.98,4341.02 1085,4336 1248.14,4336 1299,4285.14 1299,1390.51 2259.07,430.44 2282.51,407 2282.51,376.5 2290.31,368.7 D3.15
adci3_3_N: D2.16 X3.38 | length 4536.1
  Top Layer w5: X3.38 1079.98,4465.13 1010,4395.14 1010,1332.37 1877.07,465.3 1880,462.37 1910.37,432 1910.37,376.5 1902.58,368.7 D2.16
adci3_3_P: D2.15 X3.37 | length 4684.4
  Top Layer w5: X3.37 1120,4539.43 1120,4458 1101,4439 1068,4439 1020,4391 1020,1336.51 1887.07,469.44 1920.37,436.14 1920.37,376.5 1928.17,368.7 D2.15
adci3_4_N: D1.9 X3.36 | length 4816.3
  Top Layer w5: X3.36 1079.98,4717.02 1074.57,4722.43 999.06,4722.43 971,4694.37 971,1244.51 1711.77,503.74 1711.77,376.5 1719.57,368.7 D1.9
adci3_4_P: D1.10 X3.35 | length 4836.9
  Top Layer w5: X3.35 1079.98,4737.98 1074.43,4732.43 994.91,4732.43 961,4698.51 961,1240.37 1633,568.37 1701.77,499.6 1701.77,376.5 1693.98,368.7 D1.10
adci3_5_N: D1.12 X3.32 | length 5170.9
  Top Layer w5: X3.32 1079.98,5037.37 1077.06,5034.44 1027.14,5034.44 1027.07,5034.37 973.86,5034.37 911,4971.51 911,1214.37 1584.07,541.3 1587,538.37 1650.59,474.78 1650.59,376.5 1642.8,368.7 D1.12
adci3_5_P: D1.11 X3.33 | length 5154.3
  Top Layer w5: X3.33 1079.98,5021.51 1077.06,5024.44 1031.28,5024.44 1031.21,5024.37 978,5024.37 921,4967.37 921,1218.51 1594.07,545.44 1660.59,478.92 1660.59,376.5 1668.39,368.7 D1.11
adci3_6_N: D1.13 X3.31 | length 5397.7
  Top Layer w5: X3.31 1079.98,5221.51 1077.06,5224.44 930.07,5224.44 877,5171.37 877,1195.51 1609.41,463.1 1609.41,376.5 1617.2,368.7 D1.13
adci3_6_P: D1.14 X3.30 | length 5414.3
  Top Layer w5: X3.30 1079.98,5237.37 1077.06,5234.44 925.93,5234.44 867,5175.51 867,1191.37 1511,547.37 1599.41,458.96 1599.41,376.5 1591.61,368.7 D1.14
clk_60: X3.77 X5.14 | length 923.4
  Bottom Layer w12: X3.77 5062.58,2137 5294,2137 X5.14
DIO0: X6.44
DIO1: X6.6
DIO2: X6.42
DIO3: X6.8
DIO4: X6.39
DIO5: X6.9
DIO6: X6.38
DIO7: X6.11
DIO8: X6.35
DIO9: X6.14
DIO10: X6.36
DIO11: X6.15
DIO12: X6.33
DIO13: X6.18
DIO14: X6.32
DIO15: X6.17
DIO16: X6.29
DIO17: X6.20
DIO18: X6.30
DIO19: X6.21
DIO20: X6.27
DIO21: X6.23
DIO22: X6.26
DIO23: X6.24
eno: X3.47 X7.4 | length 2389.3
  Bottom Layer w12: X7.4@710,2585.45 1381.37,2585.45 1706,2910.08 1706,3517 1643.56,3579.44 X3.47
GND: C1.1 C2.1 C3.1 C4.1 C5.1 C6.1 C7.1 C8.1 C9.1 C10.1 C11.1 C12.1 C13.1 D1.5 D1.8 D2.5 D2.8 D3.5 D3.8 D4.5 D4.8 D5.5 D5.8 D6.5 D6.8 D7.5 D7.8 D8.5 D8.8 P1.1 P1.2 P2.1 P2.2 P3.1 P3.2 P4.1 P4.2 P5.1 P5.2 X1.4 X1.5 X1.6 X3.49 X3.51 X4.4 X4.5 X4.6 X5.1 X5.6 X5.11 X5.16 X5.21 X5.26 X5.31 X5.36 X5.43 X5.50 X6.1 X6.4 X6.7 X6.10 X6.13 X6.16 X6.19 X6.22 X6.25 X6.28 X6.31 X6.34 X6.37 X6.40 X6.43 X6.45 X6.46 X6.47 X6.48 X6.49 X6.50 X7.1 X7.6 X7.11 X7.16 X7.21 X7.26 X7.31 X7.36 X7.43 X7.50 | length 2763.3
  Top Layer w12: X7.50 776.85,354.22 C5.1 1398.78,354.22 1435,318 C6.1 ; D1.5 v1(1642.8,177.37) ; D1.8 v1(1719.57,216.37) 1796.29,216.37 C13.1 ; D2.5 v1(2004.94,177.37) ; D2.8 v1(2081.71,216.37) 2158.29,216.37 C12.1 ; D3.5 v1(2367.08,177.37) ; D3.8 v1(2443.85,216.37) 2521.29,216.37 C11.1 ; D4.5 v1(2729.22,177.37) ; D4.8 v1(2806,216.37) 2883.29,216.37 C10.1 ; D5.5 v1(3091.37,177.37) ; D5.8 v1(3168.14,216.37) 3245.29,216.37 C9.1 ; D6.5 v1(3453.51,177.37) ; D6.8 v1(3530.28,216.37) 3607.29,216.37 C8.1 ; D7.5 v1(3815.65,177.37) ; D7.8 v1(3892.42,216.37) 3969.29,216.37 C7.1 ; D8.5 v1(4177.79,177.37) ; D8.8 v1(4254.57,216.37)
lack0: X3.58 X5.39 | length 3584
  Bottom Layer w12: X3.58 2198.23,1836 2957,1836 4006,787 X5.39
lack1: X3.68 X5.35 | length 2501.2
  Bottom Layer w12: X3.68 4047.23,987 X5.35
lclk0: X3.57 X5.41 | length 3726.3
  Bottom Layer w12: X3.57 2115.23,1819 2860,1819 3994,685 X5.41@5244,685
lclk1: X3.67 X5.24 | length 2499.5
  Bottom Layer w12: X3.67 3026.36,1909.36 3082,1965 4770,1965 5100,1635 5296,1635 X5.24
lnk0_0: X3.59 X5.37 | length 3442.6
  Bottom Layer w12: X3.59 2281.23,1853 3061,1853 4027,887 X5.37
lnk0_1: X3.60 X5.13 | length 2993.1
  Bottom Layer w12: X3.60 2503.5,2088 X5.13@5244,2088
lnk0_2: X3.61 X5.15 | length 2919.2
  Bottom Layer w12: X3.61 2584.5,2069 5162,2069 X5.15
lnk0_3: X3.62 X5.18 | length 2954.7
  Bottom Layer w12: X3.62 2667.5,2052 5086,2052 5199,1939 5292,1939 X5.18@5349.78,1881.22
lnk0_4: X3.63 X5.17 | length 2732.1
  Bottom Layer w12: X3.63 2750.5,2035 5033,2035 5180,1888 X5.17@5244,1888
lnk0_5: X3.64 X5.20 | length 2758.2
  Bottom Layer w12: X3.64 2831.5,2016 4969,2016 5148,1837 5294,1837 X5.20
lnk0_6: X3.65 X5.19 | length 2552.2
  Bottom Layer w12: X3.65 2824.87,1922.1 2839.22,1936.45 2839.22,1938.22 2900,1999 4903,1999 5114,1788 X5.19@5244,1788
lnk0_7: X3.66 X5.22 | length 2583.4
  Bottom Layer w12: X3.66 2933.87,1918.37 2933.87,1938.87 2977,1982 4841,1982 5087,1736 5295,1736 X5.22
lnk1_0: X3.69 X5.33 | length 2359.8
  Bottom Layer w12: X3.69 4047.23,1087 X5.33
lnk1_1: X3.70 X5.32 | length 2318.3
  Bottom Layer w12: X3.70 3993.23,1241 5290,1241 X5.32
lnk1_2: X3.71 X5.29 | length 2076.9
  Bottom Layer w12: X3.71 4047.23,1287 X5.29
lnk1_3: X3.72 X5.30 | length 2076.9
  Bottom Layer w12: X3.72 4098.23,1336 5295,1336 X5.30
lnk1_4: X3.73 X5.27 | length 1835.5
  Bottom Layer w12: X3.73 3771.23,1763 4147.23,1387 X5.27
lnk1_5: X3.74 X5.28 | length 1847.4
  Bottom Layer w12: X3.74 4195.23,1439 5292,1439 X5.28@5352.44,1378.56
lnk1_6: X3.75 X5.25 | length 1594.5
  Bottom Layer w12: X3.75 3880.23,1854 4248.23,1486 X5.25@5244,1486
lnk1_7: X3.76 X5.23 | length 1451.8
  Bottom Layer w12: X3.76 4245.23,1589 X5.23@5244,1589
LVDS: C5.2 C6.2 C7.2 C8.2 C9.2 C10.2 C11.2 C12.2 C13.2 D1.1 D1.4 D2.1 D2.4 D3.1 D3.4 D4.1 D4.4 D5.1 D5.4 D6.1 D6.4 D7.1 D7.4 D8.1 D8.4 X4.1 | length 8563.7
  Top Layer w12: C6.2 1538.37,118.29 D1.1 1540.43,77.94 1560,58.37 1617,58.37 ; D1.4 1617.2,59.57 1617,59.37 1617,58.37 ; D2.1 1902.58,58.79 1903,58.37 ; D2.4 1979.35,59.02 1980,58.37 ; D3.1 2264.72,59.65 ; D3.4 2341.49,61.86 2338,58.37 ; D4.1 2626.86,59.23 2626,58.37 ; D4.4 2703.63,59 2703,58.37 ; D5.1 2989,61.37 2986,58.37 ; D5.4 3065.78,61.15 3063,58.37 ; D6.1 3351.15,59.22 ; D6.4 3427.92,61.45 3431,58.37 ; D7.1 3713.29,61.08 3716,58.37 ; D7.4 3790.06,59.31 3791,58.37 ; D8.1 4075.43,60.8 4073,58.37 ; D8.4 4152.2,77.41 4133.17,58.37 4073,58.37 ; 1617,58.37 1722,58.37 1763.42,99.79 1781.13,99.79 C13.2 1802,120.28 1823.99,98.29 1839.08,98.29 1879,58.37 1903,58.37 ; 1903,58.37 1980,58.37 ; 1980,58.37 2080,58.37 2125.04,103.41 2146.75,103.41 C12.2 2182.25,102.41 2202.96,102.41 2245.72,59.65 2264.72,59.65 ; 2264.72,59.65 2266,58.37 2338,58.37 ; 2338,58.37 2447,58.37 2488.42,99.79 2506.13,99.79 C11.2 2527,119.78 2548.99,97.79 2563.58,97.79 2603,58.37 2626,58.37 ; 2626,58.37 2703,58.37 ; 2703,58.37 2809,58.37 2850.42,99.79 2868.13,99.79 C10.2 2889,120.36 2910.99,98.37 2926,98.37 2966,58.37 2986,58.37 ; 2986,58.37 3063,58.37 ; 3063,58.37 3172,58.37 3212.92,99.29 3229.63,99.29 C9.2 3251,120.28 3272.99,98.29 3288.08,98.29 3327.15,59.22 3351.15,59.22 ; 3351.15,59.22 3352,58.37 3431,58.37 ; 3431,58.37 3531,58.37 3574.04,101.41 3593.75,101.41 C8.2 3633.87,99.79 3651.58,99.79 3693,58.37 3716,58.37 ; 3716,58.37 3791,58.37 ; 3791,58.37 3898,58.37 3937.92,98.29 3953.01,98.29 3975,120.28 C7.2 3996.24,99.42 4013.21,99.42 4054.26,58.37 4073,58.37
  Top Layer w25: X4.1 97,3497 97,704 683,118 C5.2 1434.71,118 C6.2
nrst: X3.56 X5.45 | length 3908.3
  Bottom Layer w12: X3.56 2032.23,1802 2786,1802 4101,487 X5.45
nstc: X3.78 X5.12 | length 923.4
  Bottom Layer w12: X3.78 5062.58,2237 5294,2237 X5.12
ovr_0: X3.85 X5.4 | length 1107.4
  Bottom Layer w12: X3.85 4929.58,3070 4964,3070 5297.17,2736.83 5297.17,2635.83 X5.4@5345,2588
ovr_1: X3.102 X5.2 | length 2687.8
  Bottom Layer w12: X3.102 4979,4720.58 4979,3117 5344,2752 X5.2
ovr_2: X3.13 X7.5 | length 4973.5
  Bottom Layer w12: X7.5@609.81,2487.19 658,2439 1283,2439 1740,2896 1740,4941 2026,5227 2334.63,5227 X3.13
ovr_3: X3.34 X7.3 | length 3872.6
  Bottom Layer w12: X7.3@609.71,2587.08 659.78,2537 1356.96,2537 1723,2903.04 1723,4824 1667.56,4879.44 X3.34
PFI1: X6.12
PFI2: X6.41
PFI3: X6.5
PFI4: X6.3
PFI5: X6.2
sck: X3.54 X7.7 | length 1312.9
  Bottom Layer w12: X7.7 664.37,2333 1301.23,2333 X3.54
sdi: X3.55 X7.8 | length 1312.9
  Bottom Layer w12: X7.8 1346.86,2387.37 X3.55
sdo: X3.48 X7.2 | length 2225.5
  Bottom Layer w12: X7.2@710,2685.45 1457.32,2685.45 1689,2917.12 1689,3444 1653.56,3479.44 X3.48
ss: X3.53 X7.10 | length 1071.4
  Bottom Layer w12: X7.10 1246.86,2287.37 X3.53
strob_0: X3.84 X5.3 | length 947.9
  Bottom Layer w12: X3.84 4901,2998.58 4901,2925 X5.3@5241.5,2584.5
strob_1: X3.83 X5.5 | length 947.3
  Bottom Layer w12: X3.83 4813,2986.58 4813,2915 X5.5@5242.5,2485.5
strob_2: X3.82 X5.8 | length 1041.7
  Bottom Layer w12: X3.82 4747,2952.58 4747,2892 5202,2437 5294,2437 X5.8
strob_3: X3.81 X5.7 | length 864.8
  Bottom Layer w12: X3.81 5206.68,2392.9 5238.1,2392.9 X5.7
strob_4: X3.80 X5.10 | length 964.8
  Bottom Layer w12: X3.80 4627.71,2876.29 5029,2475 5166,2338 5293,2338 X5.10
strob_5: X3.79 X5.9 | length 823.4
  Bottom Layer w12: X3.79 5112.58,2287 X5.9
VCC: C1.2 C2.2 X1.1 X3.50 | length 1607.1
  Bottom Layer w25: X1.1 345,4381 345,4110 843.13,3611.87 843.13,3578.87 C1.2 870,3414.29 C2.2 869.72,3412 885.21,3396.51 885.21,3394.5 1000.27,3279.44 X3.50
VCCIO: C3.2 C4.2 X1.2 X3.52 | length 1837.8
  Bottom Layer w25: X1.2 137,4220.96 137,4096 547,3686 547,3478 809,3216 C3.2 876.71,3212.29 C4.2 1075.54,3075 X3.52
pads on no net: X1.3 X4.2 X4.3 X5.34 X5.38 X5.40 X5.42 X5.44 X5.46 X5.47 X5.48 X5.49 X7.49

## Polygon pours and split planes (outlines as drawn)
GND on Bottom Layer "Top Overlay-No Net" (solid, remove dead copper, pour order 0): 49.21,49.21 49.21,5905.51 5856.3,5905.51 5856.3,49.21

## Keep-outs
Keep-Out Layer:
  the board outline again, w10

## Other copper
Bottom Layer:
  pour cut-out: 393.7,5551.18 0,5551.18 0,5944.88 393.7,5944.88
  pour cut-out: 5905.51,5551.18 5511.81,5551.18 5511.81,5944.88 5905.51,5944.88
  pour cut-out: 5905.51,0 5511.81,0 5511.81,433.07 5905.51,433.07
  pour cut-out: 393.7,0 0,0 0,433.07 393.7,433.07

## Silkscreen, mask and mechanical layers (free items; w line width, h text height)
Top Overlay:
  circle w59.06: c4300,5808.37 r30.19
  text "ОПТО_ВПЛ" at 3262.63,1408.22 h196.85
  text "5540TH01H4" at 1657.64,1390 h196.85
  text "R2BGY" at 2627.82,628 h196.85

## Text inside footprints (layer, text, board x,y; h text height)
X5: Top Overlay "19" at 4936.54,268.68 h39.37; Top Overlay "G" at 5067.34,268.68 h39.37; Top Overlay "18" at 4936.54,368.6 h39.37; Top Overlay "17" at 5034.54,368.59 h39.37; Top Overlay "16" at 4936.54,468.51 h39.37; Top Overlay "15" at 5034.54,468.51 h39.37; Top Overlay "G" at 4969.34,568.43 h39.37; Top Overlay "14" at 5034.54,568.43 h39.37; Top Overlay "13" at 4936.54,668.35 h39.37; Top Overlay "12" at 5034.54,668.34 h39.37; Top Overlay "11" at 4949.66,768.26 h39.37; Top Overlay "10" at 5034.54,768.26 h39.37; Top Overlay "9" at 4969.34,868.18 h39.37; Top Overlay "8" at 5067.34,868.18 h39.37; Top Overlay "7" at 4969.34,968.1 h39.37; Top Overlay "G" at 5067.34,968.09 h39.37; Top Overlay "6" at 4969.34,1068.01 h39.37; Top Overlay "5" at 5067.34,1068.01 h39.37; Top Overlay "G" at 4969.34,1167.93 h39.37; Top Overlay "4" at 5067.34,1167.93 h39.37; Top Overlay "3" at 4969.34,1267.84 h39.37; Top Overlay "1" at 5080.46,1267.84 h39.37; Top Overlay "0" at 4969.34,1367.76 h39.37; Top Overlay "2" at 5067.34,1367.76 h39.37; Top Overlay "28" at 4929.98,1467.68 h39.37; Top Overlay "G" at 5067.34,1467.68 h39.37; Top Overlay "30" at 4929.98,1567.59 h39.37; Top Overlay "32" at 5027.98,1567.59 h39.37; Top Overlay "G" at 4969.34,1667.51 h39.37; Top Overlay "34" at 5027.98,1667.51 h39.37; Top Overlay "36" at 4929.98,1767.43 h39.37; Top Overlay "38" at 5027.98,1767.43 h39.37; Top Overlay "37" at 4929.98,1867.34 h39.37; Top Overlay "39" at 5027.98,1867.34 h39.37; Top Overlay "35" at 4929.98,1967.26 h39.37; Top Overlay "G" at 5067.34,1967.26 h39.37; Top Overlay "33" at 4929.98,2067.18 h39.37; Top Overlay "31" at 5041.1,2067.18 h39.37; Top Overlay "G" at 4969.34,2167.09 h39.37; Top Overlay "29" at 5027.98,2167.09 h39.37; Top Overlay "27" at 4929.98,2267.01 h39.37; Top Overlay "26" at 5027.98,2267.01 h39.37; Top Overlay "25" at 4929.98,2366.93 h39.37; Top Overlay "24" at 5027.98,2366.93 h39.37; Top Overlay "23" at 4929.98,2466.84 h39.37; Top Overlay "G" at 5067.34,2466.84 h39.37; Top Overlay "22" at 4924.2,2568.32 h39.37; Top Overlay "21" at 5039.76,2567.32 h39.37; Top Overlay "20" at 5036.2,2674.32 h39.37; Top Overlay "G" at 4937.88,2678.32 h39.37
X6: Top Overlay "G" at 4925.65,5410.06 h39.37; Top Overlay "G" at 4931.56,3307.43 h39.37; Top Overlay "G" at 5068.44,3307.43 h39.37; Top Overlay "G" at 4931.56,3407.56 h39.37; Top Overlay "G" at 5068.44,3407.56 h39.37; Top Overlay "G" at 4931.56,3507.68 h39.37; Top Overlay "G" at 5068.44,3507.68 h39.37; Top Overlay "G" at 4931.56,3607.81 h39.37; Top Overlay "D0" at 5029.08,3607.81 h39.37; Top Overlay "P2" at 4892.2,3707.93 h39.37; Top Overlay "D2" at 5029.08,3707.93 h39.37; Top Overlay "D4" at 4892.2,3808.06 h39.37; Top Overlay "G" at 5068.44,3808.06 h39.37; Top Overlay "G" at 4931.56,3908.18 h39.37; Top Overlay "D6" at 5029.08,3908.18 h39.37; Top Overlay "D8" at 4892.2,4008.31 h39.37; Top Overlay "D10" at 4996.29,4008.31 h39.37; Top Overlay "D12" at 4859.41,4108.43 h39.37; Top Overlay "G" at 5068.44,4108.43 h39.37; Top Overlay "G" at 4931.56,4208.56 h39.37; Top Overlay "D14" at 4996.29,4208.56 h39.37; Top Overlay "D16" at 4859.41,4308.68 h39.37; Top Overlay "D18" at 4996.29,4308.68 h39.37; Top Overlay "D20" at 4852.84,4408.81 h39.37; Top Overlay "G" at 5068.44,4408.81 h39.37; Top Overlay "G" at 4931.56,4508.93 h39.37; Top Overlay "D22" at 4989.73,4508.93 h39.37; Top Overlay "D21" at 4865.96,4609.06 h39.37; Top Overlay "D23" at 4989.73,4609.06 h39.37; Top Overlay "D19" at 4859.41,4709.18 h39.37; Top Overlay "G" at 5068.44,4709.18 h39.37; Top Overlay "G" at 4931.56,4809.31 h39.37; Top Overlay "D17" at 4996.29,4809.31 h39.37; Top Overlay "D15" at 4859.41,4909.43 h39.37; Top Overlay "D13" at 4996.29,4909.43 h39.37; Top Overlay "D11" at 4872.52,5009.56 h39.37; Top Overlay "G" at 5068.44,5009.56 h39.37; Top Overlay "G" at 4931.56,5109.68 h39.37; Top Overlay "D9" at 5029.08,5109.68 h39.37; Top Overlay "D7" at 4892.2,5209.81 h39.37; Top Overlay "P1" at 5042.2,5209.81 h39.37; Top Overlay "D5" at 4892.2,5309.93 h39.37; Top Overlay "G" at 5068.44,5309.93 h39.37; Top Overlay "D3" at 5029.08,5410.06 h39.37; Top Overlay "P3" at 4892.2,5510.18 h39.37; Top Overlay "D1" at 5042.2,5510.18 h39.37; Top Overlay "P4" at 4892.2,5610.31 h39.37; Top Overlay "G" at 5068.44,5610.31 h39.37; Top Overlay "P5" at 5029.08,5710.43 h39.37; Top Overlay "G" at 4931.56,5710.43 h39.37
X7: Top Overlay "19" at 408.48,264.69 h39.37; Top Overlay "G" at 871.88,263.69 h39.37; Top Overlay "18" at 409.48,370.69 h39.37; Top Overlay "17" at 867.48,366.69 h39.37; Top Overlay "16" at 302.54,468.88 h39.37; Top Overlay "15" at 400.54,468.88 h39.37; Top Overlay "G" at 335.34,568.8 h39.37; Top Overlay "14" at 400.54,568.8 h39.37; Top Overlay "13" at 302.54,668.72 h39.37; Top Overlay "12" at 400.54,668.71 h39.37; Top Overlay "11" at 315.66,768.63 h39.37; Top Overlay "10" at 400.54,768.63 h39.37; Top Overlay "9" at 335.34,868.55 h39.37; Top Overlay "8" at 433.34,868.55 h39.37; Top Overlay "7" at 335.34,968.47 h39.37; Top Overlay "G" at 433.34,968.46 h39.37; Top Overlay "6" at 335.34,1068.38 h39.37; Top Overlay "5" at 433.34,1068.38 h39.37; Top Overlay "G" at 335.34,1168.3 h39.37; Top Overlay "4" at 433.34,1168.3 h39.37; Top Overlay "3" at 335.34,1268.21 h39.37; Top Overlay "1" at 446.46,1268.21 h39.37; Top Overlay "0" at 335.34,1368.13 h39.37; Top Overlay "2" at 433.34,1368.13 h39.37; Top Overlay "28" at 295.98,1468.05 h39.37; Top Overlay "G" at 433.34,1468.05 h39.37; Top Overlay "30" at 295.98,1567.96 h39.37; Top Overlay "32" at 393.98,1567.96 h39.37; Top Overlay "G" at 335.34,1667.88 h39.37; Top Overlay "34" at 393.98,1667.88 h39.37; Top Overlay "36" at 295.98,1767.8 h39.37; Top Overlay "38" at 393.98,1767.8 h39.37; Top Overlay "37" at 295.98,1867.71 h39.37; Top Overlay "39" at 393.98,1867.71 h39.37; Top Overlay "35" at 295.98,1967.63 h39.37; Top Overlay "G" at 433.34,1967.63 h39.37; Top Overlay "33" at 295.98,2067.55 h39.37; Top Overlay "31" at 407.1,2067.55 h39.37; Top Overlay "G" at 335.34,2167.46 h39.37; Top Overlay "29" at 393.98,2167.46 h39.37; Top Overlay "27" at 295.98,2267.38 h39.37; Top Overlay "26" at 393.98,2267.38 h39.37; Top Overlay "25" at 295.98,2367.3 h39.37; Top Overlay "24" at 393.98,2367.3 h39.37; Top Overlay "23" at 295.98,2467.21 h39.37; Top Overlay "G" at 433.34,2467.21 h39.37; Top Overlay "22" at 295.98,2567.13 h39.37; Top Overlay "21" at 407.1,2567.13 h39.37; Top Overlay "20" at 393.98,2667.05 h39.37; Top Overlay "G" at 335.34,2667.05 h39.37